# Altium PCB SunRefPCB.PcbDoc
Units mil, origin at the board's own origin, x right, y up, seen from the top; angles counter-clockwise.
Board outline 3254.33 x 2228.74 mil, 2 copper layers (Top Layer, Bottom Layer); 55 components, 36 nets, 224 pads, 35 vias.
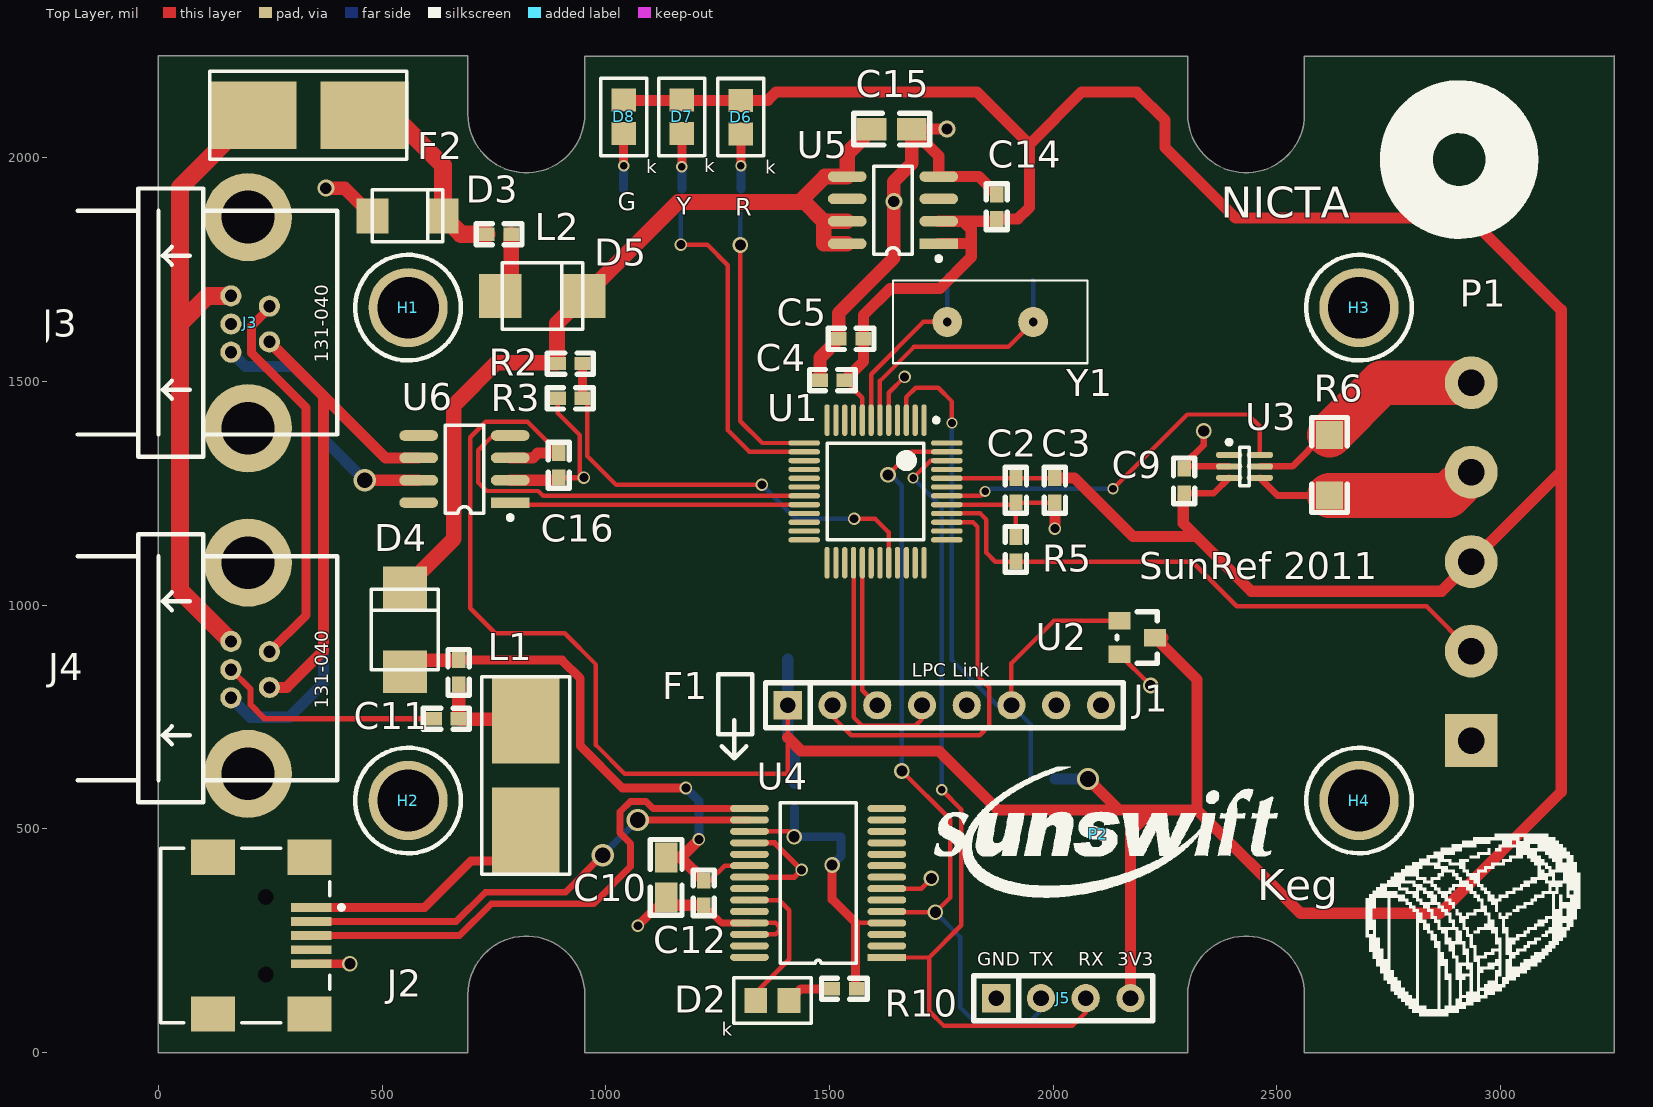
[diagram p0: Top Layer view]
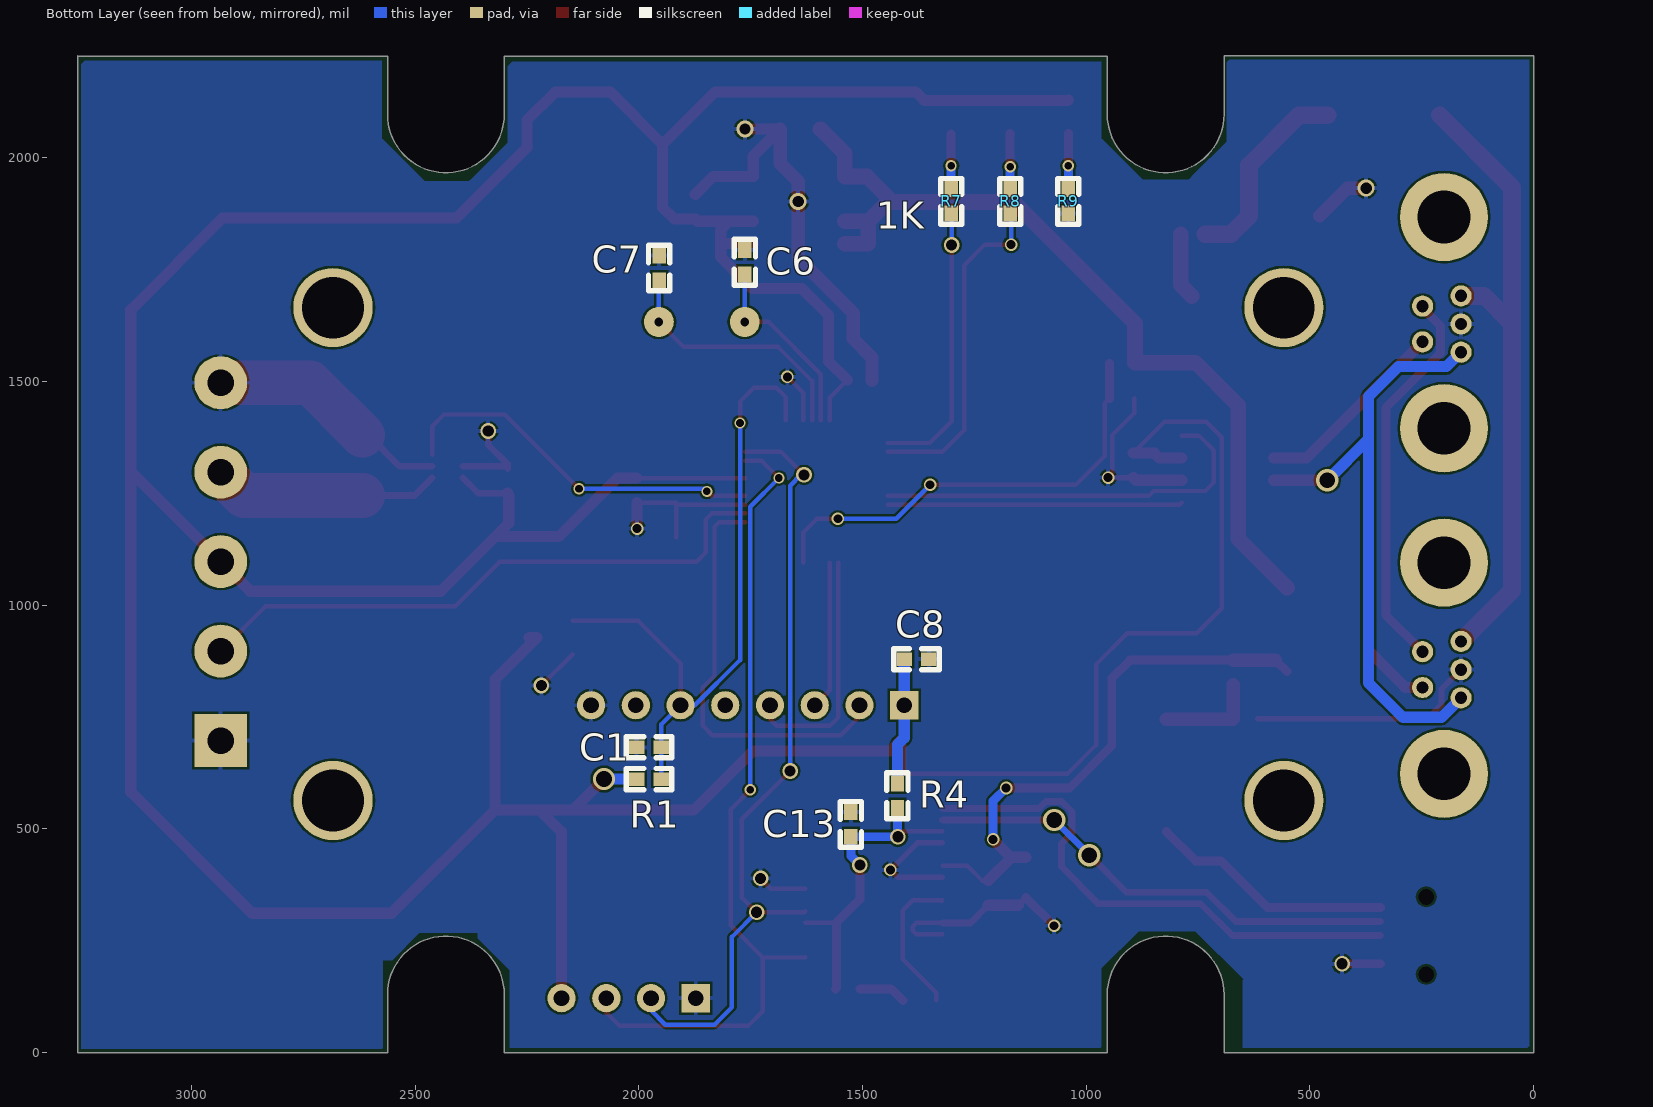
[diagram p1: Bottom Layer view, seen from below]

## Layer stack, top to bottom
Top Layer: signal copper 1.4
Dielectric: dielectric 12.6, FR-4, Dk 4.8
Bottom Layer: signal copper 1.4

## Board outline
0,-1 691.93,-1 691.93,129.32 cw(c822.44,129.32) 952.95,129.32 952.95,-1 2300.98,-1 2300.98,129.32 cw(c2431.5,129.32) 2562.01,129.32 2562.01,-1 2562.2,-1.2 3254.13,-1.2 3254.13,2227.54 3253.94,2227.35 2562.01,2227.35 2562.01,2097.03 cw(c2431.5,2097.03) 2300.98,2097.03 2300.98,2227.35 952.95,2227.35 952.95,2097.03 cw(c822.44,2097.03) 691.93,2097.03 691.93,2227.54 -0.2,2227.54

## Design rules (kind name [scope] priority, off if disabled: settings)
Clearance [All] p1: gap=5
HoleSize [All] p1: absolutevalues=TRUE maxlimit=150 minlimit=1 maxpercent=80.000 minpercent=20.000
MinimumSolderMaskSliver [All] p1: minsoldermaskwidth=0
PolygonConnect [All] p1: connectstyle=Relief reliefconductorwidth=10 reliefentries=4 polygonreliefangle="90 Angle"
RoutingVias [All] p1: holewidth=28 width=50 viastyle="Through Hole" minholewidth=15 minwidth=20 maxholewidth=40 maxwidth=50
SilkToSilkClearance [All] p1 off: silktosilkclearance=0
SilkscreenOverComponentPads [All] p1: minsilkscreentomaskgap=0
SolderMaskExpansion [All] p1: expansion=4
Width [All] p1: maxlimit=100 minlimit=10 preferedwidth=20
24 further rules are at their usual default settings.

## Classes and differential pairs
component class TopLevel: C9 C14 C15 D4 D5 D6 D7 D8 J5 P1 R2 R3 R4 R5 R6 R7 R8 R9 U3 U5
component class CAN: C16 D3 F2 J3 J4 L2 U6
component class LPC_Rep: C1 C2 C3 C4 C5 C6 C7 C8 J1 R1 U1 U2 Y1
component class USBserial: C10 C11 C12 C13 D2 F1 J2 L1 R10 U4

## Components (designator, comment, footprint, x,y, rotation, side; value= is the part's Value field where it differs from the comment)
C1 "10nF" 0603 1950,682 r0 bottom
C2 "10nF" 0603 1917.1,1229 r90 top
C3 "100nF" 0603 2004.1,1229 r90 top
C4 "10nF" 0603 1479,1503 r0 top
C5 "100nF" 0603 1521,1595 r0 top
C6 "18pF" 0603 1763,1739 r90 bottom
C7 "18pF" 0603 1955,1726 r90 bottom
C8 "100nF" 0603 1407,879 r180 bottom
C9 "Cap" 0603 2293,1250 r90 top
C10 "10u" 0805 1135,346 r90 top
C11 "100n" 0603 671,746 r180 top
C12 "100n" 0603 1219,384 r270 top
C13 "100n" 0603 1526,482 r90 bottom
C14 "2.2u" 0603 1874.1,1918 r270 top
C15 "10u" 0805 1594.1,2064 r0 top
C16 "100nF" 0603 895,1285 r90 top
D2 "LED" 0805LED 1410,116 r180 top
D3 "12V Transient Suppressor" SMA 557,1870 r0 top
D4 "MBRS130" SMB 551,945 r90 top
D5 "MBRS130" SMB 858,1691 r0 top
D6 "LEDRED" 0805LED 1302,2128 r270 top
D7 "LEDYLW" 0805LED 1170,2129 r270 top
D8 "LEDGRN" 0805LED 1040,2129 r270 top
F1 "500mA" LITTELFUSE-154 821,619 r90 top
F2 "125mA/3A" LITTELFUSE-154 335,2095 r0 top
H1 "HOLE" M2.5 558,1665 r0 top
H2 "HOLE" M2.5 558,563 r0 top
H3 "HOLE" M2.5 2684,1665 r0 top
H4 "HOLE" M2.5 2684,563 r0 top
J1 "LPC SWD Connector" IDC8 1407,776 r0 top
J2 "USB_MINIB" USB/SM0.8-6H5 33,261 r180 top
J3 "CON5-S" TRIAD5F 248.03,1668.31 r90 top
J4 "CON5-S" TRIAD5F 248.03,895.67 r90 top
J5 "UART_Header" IDC4 1873,121 r0 top
L1 "FERRITE" 0603 671,822 r90 top
L2 "FERRITE" 0603 734,1829 r0 top
P1 "Connector" TERMBLOCK5 2935,697 r180 top
P2 "SUN_LOGO" SUNSWIFTLOGO 2101,488 r0 top (schematic designator P1)
R1 "10k" 0603 1950,611 r0 bottom
R2 "4.7K" 0603 948,1540 r180 top
R3 "1K" 0603 893,1462 r0 top
R4 "Res3" 0603 1422,546 r90 bottom
R5 "1K" 0603 1917.1,1152 r270 top
R6 "0R0045" 1206 2618,1380 r270 top
R7 "1K" 0603 1302,1930 r270 bottom
R8 "1K" 0603 1170,1930 r270 bottom
R9 "1K" 0603 1040,1930 r270 bottom
R10 "1K" 0603 1506,142 r0 top
U1 "LPC11C14" TSQFP50P900X900-48N 1603.1,1254 r270 top
U2 "XC61CN2002MR" SOT23-3 2148.1,965 r270 top
U3 "INA214" "SOP6 - INA214" 2428,1310 r0 top
U4 "FT232R" SSOP28w 1478,381 r180 top
U5 "MIC5200" SO8 1642.1,1883 r90 top
U6 "SN65HVD232" SO8 684,1304 r90 top
Y1 "12 MHz" HC49/4H 2077,1633 r180 top

## Footprints (in the part's own frame and the unit in brackets; to place one, negate y for a bottom-side part, rotate by r counter-clockwise, add the part's x,y. Pads: shape width x height; smd on the part's side, far side on the other; paste and mask are expansions set on the pad)
0603 [mil]
  rect 35.43x30 smd: 1(0,0) 2(55,0)
  silkscreen extent -24,-24 79,24
0805 [mm]
  rect 1.7x1.27 smd: 1(0,0) 2(2.286,0)
  silkscreen extent -1,-0.9 3.3,0.9
0805LED [mm]
  rect 1.3x1.4 smd: A(0,0) K(1.9,0)
  silkscreen extent -1.25,-1.3 3.15,1.3
1206 [mil]
  rect 62.99x60 smd: 1(0,0) 2(135,0)
  silkscreen extent -39,-39 173,39
HC49/4H [mm]
  round 1.7 hole 0.5: 1(3.085,0) 2(7.965,0)
  silkscreen extent 0,-2.35 11.05,2.35
IDC4 [mm]
  rect 1.6x1.6 hole 0.9: 1(0,0)
  round 1.6 hole 0.9: 2(2.54,0) 3(5.08,0) 4(7.62,0)
  silkscreen extent -1.27,-1.27 8.89,1.27
IDC8 [mm]
  rect 1.6x1.6 hole 0.9: 1(0,0)
  round 1.6 hole 0.9: 2(2.54,0) 3(5.08,0) 4(7.62,0) 5(10.16,0) 6(12.7,0) 7(15.24,0) 8(17.78,0)
  silkscreen extent -1.27,-1.27 19.05,1.27
LITTELFUSE-154 [mm]
  rect 5x3.81 smd: 1(-3.185,0) 2(3.185,0)
  silkscreen extent -5.6,-2.51 5.6,2.5
M2.5 [mm]
  round 4.5 hole 3.5: 1(0,0)
  silkscreen extent -3,-3 3,3
SMA [mm]
  rect 1.8x2 smd: A(-2,0) K(2,0)
  silkscreen extent -2,-1.48 2,1.48
SMB [mm]
  rect 2.4x2.5 smd: A(-2.385,0) K(2.385,0)
  silkscreen extent -2.28,-1.9 2.3,1.9
SO8 [mm]
  rect 0.6x2.2 smd: 1(-1.905,-2.6)
  oval 0.6x2.2 smd: 2(-0.635,-2.6) 3(0.635,-2.6) 4(1.905,-2.6) 5(1.905,2.6) 6(0.635,2.6) 7(-0.635,2.6) 8(-1.905,2.6)
  silkscreen extent -2.88,-2.72 2.5,1.1
"SOP6 - INA214" [mm] "TSOP, 6-Leads, Body 2.2x1.4mm (max), Pitch 0.65mm, IPC Medium Density"
  oval 1.5x0.35 smd: 0(-0.875,0.65) 1(-0.875,0) 2(-0.875,-0.65) 3(0.875,-0.65) 4(0.875,0) 5(0.875,0.65)
  silkscreen extent -1,-1.1 0.28,1.5, body extent -0.7,-1.07 0.7,1.08, height 1.1
SOT23-3 [mm]
  rect 1x1.25 smd: 1(0,0) 2(1.905,0) 3(0.965,2.032)
  silkscreen extent -0.51,-0.13 2.41,2.16
SSOP28w [mm]
  rect 2.2x0.4 smd: 1(-3.82,4.28)
  oval 2.2x0.4 smd: 2(-3.82,3.63) 3(-3.82,2.98) 4(-3.82,2.33) 5(-3.82,1.68) 6(-3.82,1.03) 7(-3.82,0.38) 8(-3.82,-0.27) 9(-3.82,-0.92) 10(-3.82,-1.57) 11(-3.82,-2.22) 12(-3.82,-2.87) 13(-3.82,-3.52) 14(-3.82,-4.17) 15(3.98,-4.17) 16(3.98,-3.52) 17(3.98,-2.87) 18(3.98,-2.22) 19(3.98,-1.57) 20(3.98,-0.92) 21(3.98,-0.27) 22(3.98,0.38) 23(3.98,1.03) 24(3.98,1.68) 25(3.98,2.33) 26(3.98,2.98) 27(3.98,3.63) 28(3.98,4.28)
  silkscreen extent -2.09,-4.5 2.25,4.6
SUNSWIFTLOGO [mil] "Sunswift Logo"
  silkscreen extent -367,-141 401,150
TERMBLOCK5 [mm]
  rect 3x3 hole 1.5: 1(0,0)
  round 3 hole 1.5: 2(0,-5.08) 3(0,-10.16) 4(0,-15.24) 5(0,-20.32)
TRIAD5F [mm]
  round 5 hole 3: 0(-6.934,1.219) 0(5.055,1.219)
  round 1.2 hole 0.7: 1(0,0) 2(0.584,2.184) 3(-1.016,2.184) 4(-2.616,2.184) 5(-2.032,0)
  silkscreen extent -8.56,-3.86 6.68,10.87
TSQFP50P900X900-48N [mm]
  oval 1.8x0.3 smd: 1(-4.05,2.75) 2(-4.05,2.25) 3(-4.05,1.75) 4(-4.05,1.25) 5(-4.05,0.75) 6(-4.05,0.25) 7(-4.05,-0.25) 8(-4.05,-0.75) 9(-4.05,-1.25) 10(-4.05,-1.75) 11(-4.05,-2.25) 12(-4.05,-2.75) 25(4.05,-2.75) 26(4.05,-2.25) 27(4.05,-1.75) 28(4.05,-1.25) 29(4.05,-0.75) 30(4.05,-0.25) 31(4.05,0.25) 32(4.05,0.75) 33(4.05,1.25) 34(4.05,1.75) 35(4.05,2.25) 36(4.05,2.75)
  oval 0.3x1.8 smd: 13(-2.75,-4.05) 14(-2.25,-4.05) 15(-1.75,-4.05) 16(-1.25,-4.05) 17(-0.75,-4.05) 18(-0.25,-4.05) 19(0.25,-4.05) 20(0.75,-4.05) 21(1.25,-4.05) 22(1.75,-4.05) 23(2.25,-4.05) 24(2.75,-4.05) 37(2.75,4.05) 38(2.25,4.05) 39(1.75,4.05) 40(1.25,4.05) 41(0.75,4.05) 42(0.25,4.05) 43(-0.25,4.05) 44(-0.75,4.05) 45(-1.25,4.05) 46(-1.75,4.05) 47(-2.25,4.05) 48(-2.75,4.05)
  silkscreen extent -4.17,-2.75 2.75,3.58, body extent -3.5,-3.5 3.5,3.5, height 1.6
USB/SM0.8-6H5 [mm] "Connector; USB2.0, Type B, SM; 5 Position; Right Angle"
  rect 2.3x0.5 smd: 1(-7.85,-1.6) 2(-7.85,-0.8) 3(-7.85,0) 4(-7.85,0.8) 5(-7.85,1.6)
  rect 2.5x2 smd: 6(-7.75,4.45) 7(-2.25,4.45) 8(-7.75,-4.45) 9(-2.25,-4.45)
  round 0.6 hole 0.9 unplated: MH1(-5.25,2.2) MH2(-5.25,-2.2)
  silkscreen extent -9.68,-4.95 0.7,4.95, body extent -8.9,-4.95 0.7,4.95, height 3.9

## Part data
C1 C2 C3 C4 C5 C6 C7 C8 C10 C11 C12 C13 C14 C15 C16: library part CAP, "Capacitor"
C9: "Capacitor"
D3: library part DIODE, "Diode"
D4 D5: library part "D SCHOTTKY", "Schottky Diode"
D6 D7 D8: library part LED
F1 F2: library part FUSE2, "Fuse"
H1 H2 H3 H4: "Hole"
J1: library part LPCLink_Connector
J2: library part USB_miniB_SMT, "USB Mini B Connector"
J3 J4: "Connector, 2 pin, with shield @ S"
L1 L2: library part INDUCTOR, "Inductor"
P1: library part CONN
R1 R2 R3 R5 R6 R7 R8 R9: library part RES1, "Resistor"
R4: "Resistor"
R10: library part "Res Semi", "Semiconductor Resistor"
U1: library part LPC11C14_Full
U2: library part XC61F, "SOT23 reset generator"
U4: "USB UART IC"
U5: "MIC5200 - SO8"
U6: "3.3V CAN Transciever"
Y1: library part CRYSTAL, "Crystal"

## Free pads (board coordinates)
  round 118.11 on Top Overlay mask+7.87: 2(3134,1978)

## Via types
v1: diameter 35, hole 25, Top Layer to Bottom Layer, 10 vias
v2: diameter 28, hole 20, Top Layer to Bottom Layer, 10 vias
v3: diameter 25, hole 17, Top Layer to Bottom Layer, 8 vias
v4: diameter 50, hole 35, Top Layer to Bottom Layer, 4 vias
v5: diameter 38, hole 25, Top Layer to Bottom Layer, 3 vias

## Nets (pads, with @x,y where several pads share a name; then routed paths per layer and width w, separated by ;. In a path a pad name is that pad's centre, name@x,y a point inside that pad or via, vN(x,y) a via of type N, cw(c..) or ccw(c..) an arc to the next point about the centre after c; other vN are vias at no path point)
/RESET: C1.1 J1.6 R1.1 U1.3 U2.1 | length 1485.2
  Top Layer w10: U1.3 1672,1465 1693,1486 1743,1486 1774,1455 v3(1774,1407) ; J1.6 1907,870 2002,965 U2.1
  Bottom Layer w10: v3(1774,1407) 1774,877 1875,776 J1.6 1950,733 C1.1 R1.1
CAN12V: D5.A L2.2 | length 148.3
  Top Layer w35: D5.A 789,1715.9 L2.2
CAN+5V: J3.1 J4.1 | length 873.7
  Top Layer w20: J4.1 330,977.64 330,1441 208,1563 208,1624 248.03,1664.03 J3.1
CAN+12V: D3.K F2.2 L2.1 | length 450.1
  Top Layer w40: F2.2 524,2095 635.74,1983.26 D3.K 676.74,1829 L2.1
CAN_H: J3.4 J4.4 U6.7 | length 1395.8
  Top Layer w25: v4(461,1279) U6.7
  Bottom Layer w25: J4.4 205.7,749 292,749 369,826 369,1371 ; J3.4 194.34,1533 302,1533 369,1466 369,1371 ; v4(461,1279) 369,1371
CAN_L: J3.5 J4.5 U6.6 | length 1165.4
  Top Layer w25: J4.5 286.67,815.67 369,898 369,1467.34 ; J3.5 507.34,1329 U6.6
CANGND: C1.2 C2.1 C3.1 C4.1 C5.1 C6.2 C7.2 C8.2 C9.2 C10.1 C11.2 C12.2 C13.2 C14.1 C15.2 C16.1 D3.A J1.8 J2.5 J3.3 J4.3 J5.1 P1.1 P1.5 R3.1 R5.1 R6.1 R9.2 U1.5 U1.41 U2.2 U3.1 U3.4 U4.7 U4.18 U4.21 U4.25 U4.26 U5.4 U6.2 | length 4271.6
  Top Layer w10: R3.1 893,1429 942,1380 942,1294 v2(951,1285) ; U4.26 1379.68,263.68 1388,272 1388,281 1379.73,289.27 U4.25 ; U4.7 1705.04,366.04 v1(1728,389) ; U1.5 1632.63,1474.63 v2(1668,1510) ; U1.41 1912.57,1224.47 C2.1 ; R5.1 C2.1 ; C3.1 C2.1 ; U2.2 v1(2218.1,820)
  Top Layer w12: C16.1 v2(951,1285) ; U4.21 1421.63,391.63 v2(1438,408) 1377.6,468.4 U4.18
  Top Layer w13: J4.3 206,811.7 206,777 237,746 C11.2
  Top Layer w15: C10.1 C10.1@1152,329 ; C12.2 1258.73,289.27 U4.25 ; v1(2337,1389) 2337,1358 2293,1314 C9.2 2298,1310 U3.1 ; U3.4 2535,1310 2605,1380 R6.1
  Top Layer w20: J2.5 v1(427.99,198.01) ; v2(1072,283) C10.1
  Top Layer w25: U6.2 889,1279 C16.1 ; C10.1@1152,329 C12.2 ; v5(1763,2064) C15.2 1744.46,2003.64 U5.4 1834.1,1958 C14.1 ; v2(2004.1,1171.1) C3.1
  Top Layer w30: v5(374,1932) 416.26,1932 D3.A ; C4.1 1479,1553 C5.1 1521,1653 1644,1776 v5(1644,1902) 1644,1947 1684.1,1987.1 C15.2
  Top Layer w100: R6.1 2735,1497 P1.5
FTDI3V3: C13.1 R4.1 R10.2 U4.4 U4.17 | length 714.8
  Top Layer w10: U4.17 1409.01,493.99 v1(1421,482) ; 1558.73,289.27 U4.4
  Top Layer w20: v1(1506,419) 1506,342 1558.73,289.27 1558.73,144.27 R10.2
  Bottom Layer w20: R4.1 1422,483 v1(1421,482) C13.1 1526,439 v1(1506,419)
LEDRED: R7.2 U1.13 | length 627.3
  Top Layer w10: v1(1301,1805) 1301,1411 1349.73,1362.27 U1.13
  Bottom Layer w10: v1(1301,1805) 1301,1874 R7.2
LEDYLW: R8.2 U1.14 | length 753.8
  Top Layer w10: v2(1168,1806) 1227,1806 1273,1760 1273,1391.17 1321,1343.17 1321,1342.58 U1.14
  Bottom Layer w10: v2(1168,1806) 1168,1873 R8.2
NetC11_1: C11.1 F1.2 L1.1 | length 226.7
  Top Layer w25: C11.1 C11.1@672.61,744.39
  Top Layer w30: C11.1 L1.1 ; C11.1@672.61,744.39 F1.2
NetD2_A: D2.A R10.1 | length 106.8
  Top Layer w20: D2.A 1436,142 R10.1
NetD2_K: D2.K U4.23 | length 335.3
  Top Layer w10: U4.23@1324.02,337.73 U4.23 1386.45,340.45 1387,341 1410,318 1410,208 1335.2,133.2 D2.K
NetD6_K: D6.K R7.1 | length 123.2
  Top Layer w20: v3(1302,1982) D6.K
  Bottom Layer w20: R7.1 v3(1302,1982)
NetD7_K: D7.K R8.1 | length 124.2
  Top Layer w20: v3(1170,1980) D7.K
  Bottom Layer w20: R8.1 v3(1170,1980)
NetD8_K: D8.K R9.1 | length 124.2
  Top Layer w20: v3(1040,1982) D8.K
  Bottom Layer w20: R9.1 v3(1040,1982)
NetF1_1: F1.1 J2.1 | length 549.2
  Top Layer w20: J2.1 594.99,323.99 699,428 755.39,428 F1.1
NetF2_1: F2.1 J3.2 J4.2 | length 1430.3
  Top Layer w40: J4.2 48,1032.7 48,1629 ; J3.2 110.31,1691.31 48,1629 ; F2.1 48,1933.39 48,1629
NetJ2_2: J2.2 U4.16 | length 1073.3
  Top Layer w15: J2.2 665.5,292.5 731,358 910,358 v4(993,441) ; v4(1071.58,519.58) U4.16
  Bottom Layer w15: v4(993,441) v4(1071.58,519.58)
NetJ2_3: J2.3 U4.15 | length 1215.3
  Top Layer w15: J2.3 673,261 744,332 972.39,332 1055.5,415.11 1055.5,466.89 1032,490.39 1032,538 1055,561 1090,561 1105.83,545.17 U4.15
NetP1_2: P1.2 R5.2 U1.40 | length 1343.3
  Top Layer w10: U1.40 1837.32,1204.79 1851.1,1191 1851.1,1117 1871.1,1097 R5.2 2311,1097 2411,997 2835,997 P1.2
NetP1_4: P1.4 R6.2 U3.3 | length 510.4
  Top Layer w15: U3.3 2501.86,1245 R6.2
  Top Layer w100: R6.2 2883,1245 P1.4
NetR2_1: R2.1 R3.2 U1.32 | length 1023.7
  Top Layer w10: R3.2 959,1451 959,1333 1023,1269 v2(1349,1269) ; v2(1555,1193) 1602,1193 1632.63,1162.37 U1.32
  Top Layer w20: R3.2 R2.1
  Bottom Layer w10: v2(1349,1269) 1425,1193 v2(1555,1193)
NetU1_19: U1.19 U6.4 | length 898
  Top Layer w10: U6.4 748,1379 715,1346 715,1274 734,1255 849,1255 859.84,1244.16 U1.19
NetU1_20: U1.20 U6.1 | length 659.2
  Top Layer w10: U6.1 790.89,1224.47 U1.20
NetU1_42: U1.42 U3.5 | length 850.1
  Top Layer w10: U1.42 1838.16,1244.16 v3(1848,1254) ; v3(2134,1260) 2300,1426 2436,1426 2462.45,1399.55 U3.5
  Bottom Layer w10: v3(1848,1254) 1854,1260 v3(2134,1260)
REG3V3: C2.2 C3.2 C4.2 C5.2 C8.1 C9.1 C14.2 C16.2 D6.A D7.A D8.A J1.1 J5.4 P1.3 R1.2 R4.2 U1.8 U1.44 U2.3 U3.2 U5.1 U5.2 U6.3 | length 11613.4
  Top Layer w10: C16.2 825,1410 732,1410 697,1375 697,993 753,937 908,937 978,867 978,687 1042,623 1407,623 1407,704 J1.1 ; C4.2 1573.57,1463.43 U1.8 ; U1.44 1916.63,1283.53 C2.2 C3.2
  Top Layer w15: C9.1@2295,1250 2359.14,1250 U3.2
  Top Layer w25: U6.3 837,1329 848,1340 C16.2 ; D8.A 1041,2128 D6.A 1362,2128 1381,2147 1830,2147 1947,2030 ; 1407,704 1437,674 1745,674 1877,542 2147,542 ; C4.2 1576,1545 C5.2 1576,1648 1636,1708 1747.1,1708 1817.1,1778 1817.1,1804 ; U5.1 1813.1,1808 1817.1,1804 ; U5.2 1799.1,1858 ; C3.2 2048,1284 2179,1153 2321,1153 ; v4(2078,611) 2147,542 ; J5.4 2173,493 2222,542 ; U2.3@2246.1,927 U2.3 2322,833.1 2322,542 ; C9.1 2295,1250 2291,1246 2291,1183 2321,1153 ; 1799.1,1858 1817.1,1840 1817.1,1804 ; 1799.1,1858 1869.1,1858 C14.2 1921,1863 1947,1889 1947,2030 ; 1947,2030 2064,2147 2187,2147 2250,2084 2250,2023 2408,1865 2931,1865 3136,1660 3136,1298 ; 2147,542 2222,542 ; 2222,542 2322,542 ; 2321,1153 2443,1031 2869,1031 P1.3 3136,1298 ; 2322,542 2553,311 2865,311 3136,582 3136,1298
  Bottom Layer w25: C8.1 J1.1 1407,703 1422,688 R4.2 ; R1.2 v4(2078,611)
REGIN: C15.1 D4.K D5.K R2.2 U5.5 U5.7 U5.8 | length 1951.5
  Top Layer w35: D4.K 660,1147.9 660,1446 756,1542 891,1542 891,1630.1 D5.K 1161.9,1901 1433,1901 ; U5.8 1487,1808 1487,1858 ; U5.7 1487,1858 ; C15.1 1539.74,2009.64 U5.5 1490,1958 1433,1901 ; 1433,1901 1444,1901 1487,1858
RXD: J5.3 U1.46 U4.1 | length 1861.1
  Top Layer w10: U4.1 1628.89,212 1723,212 ; v3(1687,1284) 1725.9,1322.9 U1.46 ; v3(1751,587) 1795,543 1795,284 1723,212 ; J5.3 2073,89 2043,59 1756,59 1723,92 1723,212
  Bottom Layer w10: v3(1687,1284) 1751,1220 v3(1751,587)
TCLK: J1.3 U1.29 | length 332.4
  Top Layer w10: U1.29 1573.57,809.43 J1.3
TDO: J1.4 U1.28 | length 543.7
  Top Layer w10: U1.28 1553.89,749.11 1573,730 1692,730 1707,745 J1.4
TMS: J1.2 U1.39 | length 929.6
  Top Layer w10: J1.2 1507,751 1549,709 1836,709 1857,730 1857,816 1831.1,841.9 1831.1,1175 1821,1185.1 U1.39
TXD: J5.2 U1.47 U4.5 | length 1788
  Top Layer w10: U4.5@1628.54,315 U4.5 1630.25,313 v1(1737,313) 1770,346 1770,521 v1(1662,629) ; v1(1631,1291) 1682.58,1342.58 U1.47
  Bottom Layer w10: v1(1631,1291) 1638,1291 1662,1267 v1(1662,629) ; v1(1737,313) 1792,258 1792,101 1831,62 1941,62 1973,94 J5.2
USB5V: C10.2 C12.1 D4.A L1.2 U4.20 | length 1251.8
  Top Layer w10: C12.1 1233,384 1266.22,417.22 U4.20
  Top Layer w20: D4.A D4.A@576.9,877 ; L1.2 902,877 943,836 943,685 1037,591 v2(1179,591)
  Top Layer w25: C10.2 1167,436 ; v2(1208,476) 1168,436 1167,436 ; C12.1 1167,436
  Top Layer w30: D4.A@576.9,877 L1.2
  Bottom Layer w20: v2(1179,591) 1208,562 v2(1208,476)
XTALIN: C7.1 U1.6 Y1.1 | length 578
  Top Layer w10: U1.6 1612.94,1500.94 1689,1577 1899.54,1577 Y1.1
  Bottom Layer w10: C7.1 1955.54,1725.46 Y1.1
XTALOUT: C6.1 U1.7 Y1.2 | length 427.5
  Top Layer w10: U1.7 1593.26,1516.26 1710,1633 Y1.2
  Bottom Layer w10: C6.1 1763.42,1738.58 Y1.2
pads on no net: H1.1 H2.1 H3.1 H4.1 J1.5 J1.7 J2.4 J2.6 J2.7 J2.8 J2.9 J2.MH1 J2.MH2 J3.0 J4.0 U1.1 U1.2 U1.4 U1.9 U1.10 U1.11 U1.12 U1.15 U1.16 U1.17 U1.18 U1.21 U1.22 U1.23 U1.24 U1.25 U1.26 U1.27 U1.30 U1.31 U1.33 U1.34 U1.35 U1.36 U1.37 U1.38 U1.43 U1.45 U1.48 U3.0 U4.2 U4.3 U4.6 U4.8 U4.9 U4.10 U4.11 U4.12 U4.13 U4.14 U4.19 U4.22 U4.24 U4.27 U4.28 U5.3 U5.6 U6.5 U6.8

## Polygon pours and split planes (outlines as drawn)
CANGND on Bottom Layer "GNDPLANE" (solid, pour order 1001): 10,2219 680,2219 682,2217 686,2213 686,2037 686,2036 758,1964 771,1951 872,1951 874,1951 964,2041 966,2043 966,2215 2283,2215 2293,2205 2293,2049 2293,2034 2374,1953 2380,1947 2479,1947 2573,2041 2575,2043 2575,2217 3239,2217 3247,2209 3247,8 2571,8 2573,10 2573,206 2552,206 2491,267 2360,267 2360,255 2293,188 2289,184 2289,10 962,10 966,14 966,151 966,188 885,269 883,271 762,271 756,271 648,163 650,161 650,10 14,10 8,16 10,18 10,2219

## Silkscreen, mask and mechanical layers (free items; w line width, h text height)
Top Overlay:
  circle w118.11: c2907.89,1996 r118.11
  region: 137 vertices and 55 holes, not listed, extent 2699,81 3179,489
  lines w10: 1259.5,684.5 1287,657 ; 1287,742 1287,657 ; 1314.5,684.5 1287,657 ; 1251,711 1328,711 1328,845 1251,845 1251,711
  text "k" at 1220,1968 h30
  text "k" at 1090,1965 h30
  text "k" at 1356,1964 h30
  text "G" at 1027,1883 h39.37
  text "Y" at 1159,1873 h39.37
  text "R" at 1290,1870 h39.37
  text "NICTA" at 2375,1842 h118.11
  text "SunRef 2011" at 2193,1058 h60
  text "LPC Link" at 1684.1,840 h30
  text "Keg" at 2457,316 h118.11
  text "GND" at 1831,194 h30
  text "TX" at 1948,194 h30
  text "RX" at 2056,194 h30
  text "3V3" at 2144,194 h30
  text "k" at 1259,37 h30
Bottom Overlay:
  text "1K" at 1469,1841 h60
Mechanical 1:
  circle w10: c563.98,1664.35 r63.05
  circle w10: c2689.96,1664.35 r63.05
  circle w10: c2689.96,561.99 r63.05
  circle w10: c563.98,561.99 r63.05
  lines w10: -0.2,-1.2 -0.2,2227.54 691.93,2227.54 691.93,2097.23 ; 0,-1 691.93,-1 691.93,129.32 cw(c822.44,129.32) 952.95,129.32 952.95,-1 2300.98,-1 2300.98,129.32 cw(c2431.5,129.32) 2562.01,129.32 2562.01,-1 ; 14.8,421.8 472.8,421.8 ; 21.8,208.8 469.8,208.8 ; 691.93,2097.03 ccw(c822.44,2097.03) 952.95,2097.03 952.95,2227.35 2300.98,2227.35 2300.98,2097.03 ccw(c2431.5,2097.03) 2562.01,2097.03 2562.01,2227.35 3253.94,2227.35 ; 2562.2,-1.2 3254.13,-1.2 3254.13,2227.54
  text "Hole = 3.5mm" at 479,2509 h39.37
  text "Press q to toggle mil and mm" at -1914.2,2014.8 h39.37
  text "CAN_2 Placement" at -984.45,1693.8 h39.37
  text "X 6.300mm" at -984.45,1591.8 h39.37
  text "Y 42.375mm" at -984.45,1486.8 h39.37
  text "CAN_1 Placement" at -984.45,917.8 h39.37
  text "X 6.300mm" at -984.45,815.8 h39.37
  text "Y 22.750mm" at -984.45,710.8 h39.37
  text "LED Placement" at -984.45,373.8 h39.37
  text "X 4.755mm" at -984.45,271.8 h39.37
  text "Y 6.770mm" at -984.45,166.8 h39.37

## Text inside footprints (layer, text, board x,y; h text height)
J2: Mechanical 1 "PCB Edge" at 15.98,419.91 h9.84 r270
J3: Top Overlay "131-040" at 380.03,1541.31 h30 r90
J4: Top Overlay "131-040" at 380.03,768.67 h30 r90